# Altium PCB PCB_MDL_SEC_BAR.PcbDoc
Units mm, origin at the board's own origin, x right, y up, seen from the top; angles counter-clockwise.
Board outline 195.18 x 55.4 mm, 2 copper layers (Top Layer, Bottom Layer); 10 components, 15 nets, 56 pads, 4 vias.
Unrouted connection lines stored in the file: 2.
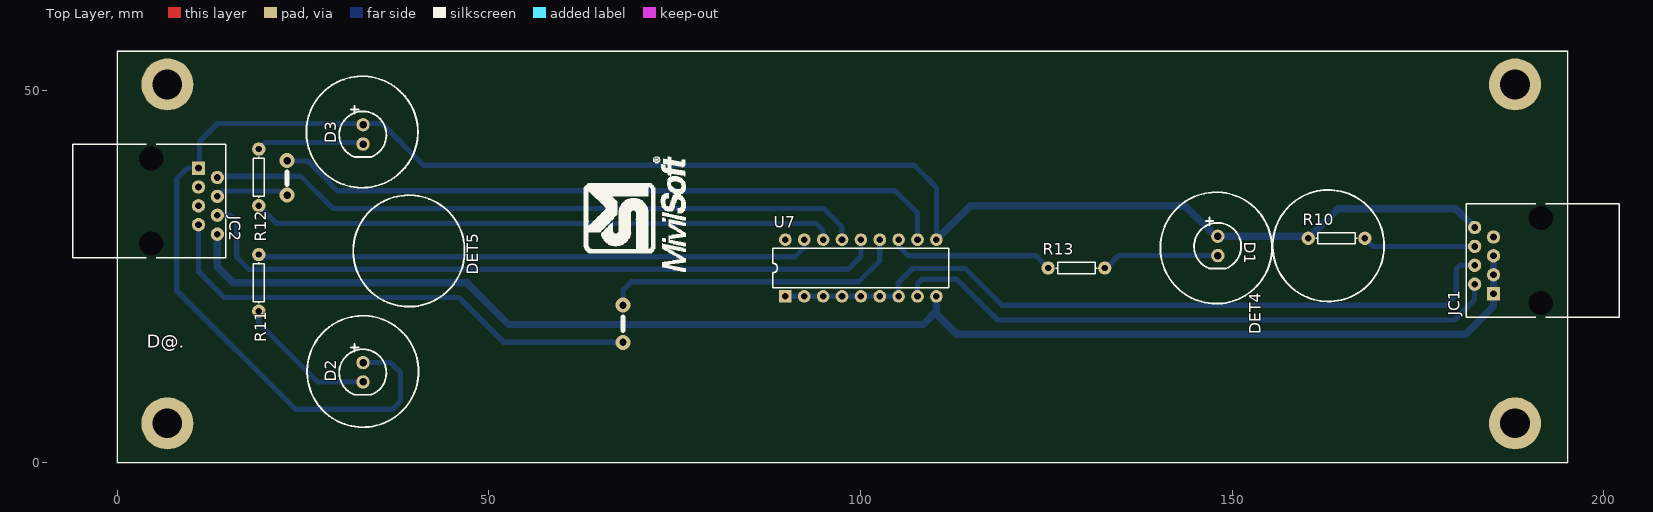
[diagram p0: Top Layer view]
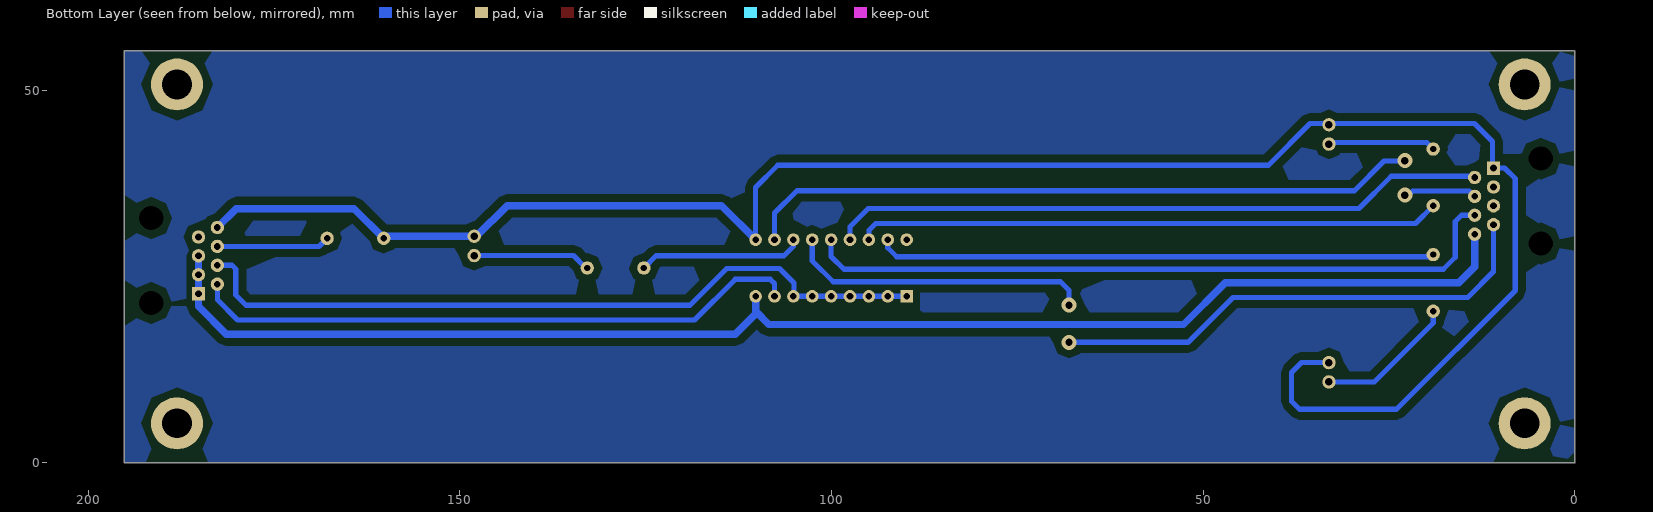
[diagram p1: Bottom Layer view, seen from below]

## Layer stack, top to bottom
Top Solder: solder mask 0.0102, Solder Resist, Dk 3.5
Top Layer: signal copper 0.0356
Dielectric 1: dielectric 0.32, FR-4, Dk 4.8
Bottom Layer: signal copper 0.0356
Bottom Solder: solder mask 0.0102, Solder Resist, Dk 3.5

## Board outline
0,0 0,55.28 cw(c0.05,55.28) 0.033,55.327 cw(c0.075,55.3) 0.075,55.35 195.099,55.35 cw(c195.099,55.3) 195.143,55.324 cw(c195.125,55.277) 195.176,55.277 195.176,0.051 cw(c195.125,0.051) 195.125,0.001 cw(c195.074,0) 195.125,0 cw(c195.074,0) 195.074,-0.05 0.05,-0.05 cw(c0.05,0)

## Design rules (kind name [scope] priority, off if disabled: settings)
Clearance "Poligono GND TOP" [(InNamedPolygon('GND BOTTON'))] p1: gap=1
Clearance [All] p2: gap=0.3
PolygonConnect [All] p1: connectstyle=Relief reliefconductorwidth=0.254 reliefentries=4 polygonreliefangle="90 Angle" airgapwidth=0.254
RoomDefinition barra_sec_principal [InComponentClass('barra_sec_principal')] p1: confinementstyle=ConfineIn formatcopy=TRUE lockcomponents=FALSE outline -0.002,0.025 195.178,0.025 195.178,55.352 -0.002,55.352
RoutingVias [All] p1: holewidth=0.711 width=1.27 viastyle="Through Hole" minholewidth=0.711 minwidth=1.27 maxholewidth=0.711 maxwidth=1.27
SolderMaskExpansion [All] p1: expansion=0.102
Width [All] p1: maxlimit=1 minlimit=0.7 preferedwidth=0.8
30 further rules are at their usual default settings.

## Components (designator, comment, footprint, x,y, rotation, side; value= is the part's Value field where it differs from the comment)
D1 "LED1" "LED5MM RED" 148.05,29.15 r270 top
D2 "LED1" "LED5MM RED" 33.05,12.15 r270 top
D3 "LED1" "LED5MM RED" 33.05,44.15 r270 top
JC1 "RJ45" 15-43-6233 202.05,27.15 r90 top
JC2 "RJ45" 15-43-6233 -5.95,35.15 r270 top
R10 "Res" AXIAL-0.3 164.05,30.15 r0 top
R11 "Res" AXIAL-0.3 19.05,24.15 r90 top
R12 "Res" AXIAL-0.3 19.05,38.345 r270 top
R13 "Res" AXIAL-0.3 129.05,26.15 r180 top
U7 "ULN2803A" A18 100.05,26.15 r0 top

## Footprints (in the part's own frame and the unit in brackets; to place one, negate y for a bottom-side part, rotate by r counter-clockwise, add the part's x,y. Pads: shape width x height; smd on the part's side, far side on the other; paste and mask are expansions set on the pad)
15-43-6233 [mm] "Connector; PCB Jack, Thru-Hole; 1-Port; Unshielded without Lightpipes; Right Angle"
  rect 1.8x1.8 hole 0.9: 1(-4.445,16.89)
  round 1.8 hole 0.9: 2(-3.175,19.43) 3(-1.905,16.89) 4(-0.635,19.43) 5(0.635,16.89) 6(1.905,19.43) 7(3.175,16.89) 8(4.445,19.43)
  round 2.95 hole 3.25 unplated: MH1(-5.715,10.54) MH2(5.715,10.54)
  silkscreen extent -7.62,0 7.62,20.58
A18 [mm] "DIP; 18 Leads; Row Spacing 7.62 mm; Pitch 2.54 mm"
  rect 1.7x1.7 hole 0.9 paste+0: 1(-10.16,-3.81)
  round 1.7 hole 0.9 paste+0: 2(-7.62,-3.81) 3(-5.08,-3.81) 4(-2.54,-3.81) 5(0,-3.81) 6(2.54,-3.81) 7(5.08,-3.81) 8(7.62,-3.81) 9(10.16,-3.81) 10(10.16,3.81) 11(7.62,3.81) 12(5.08,3.81) 13(2.54,3.81) 14(0,3.81) 15(-2.54,3.81) 16(-5.08,3.81) 17(-7.62,3.81) 18(-10.16,3.81)
  silkscreen extent -11.85,-2.65 11.85,2.65
AXIAL-0.3 [mm] "Axial Device, Thru-Hole; 2 Leads; 0.3 in Pin Spacing"
  round 1.8 hole 0.85: 1(-3.81,0) 2(3.81,0)
  silkscreen extent -2.77,-0.76 2.77,0.76
"LED5MM RED" [mm] "Led de 5mm rojo"
  round 1.8 hole 1.016: 1(-1.275,0.025) 2(1.325,0.025)
  silkscreen extent -3.81,-3.18 3.05,3.16, body extent -2.89,-2.88 2.54,3.14, height 12.31

## Part data
D1 D2 D3: "Typical RED GaAs LED"
JC1 JC2: library part 15-43-6233, "Right Angle, Standard Profile, RJ45-Keyed, Flange Mount PCB Jack"
R10 R11 R12 R13: library part Res1, "Resistor"
U7: "High-Voltage, High-Current Darlington Array"

## Free pads (board coordinates)
  round 7 hole 4: 0(6.75,5.25) 0(6.75,50.85) 0(188.05,5.25) 0(188.05,50.85)

## Via types
v1: diameter 2, hole 1, Top Layer to Bottom Layer, 4 vias

## Nets (pads, with @x,y where several pads share a name; then routed paths per layer and width w, separated by ;. In a path a pad name is that pad's centre, name@x,y a point inside that pad or via, vN(x,y) a via of type N, cw(c..) or ccw(c..) an arc to the next point about the centre after c; other vN are vias at no path point)
5VCC: D1.1 D2.1 D3.1 JC1.8 JC2.1 R10.1 U7.10 | length 258.1
  Bottom Layer w0.7: JC2.1 9.445,39.595 8,38.15 8,23.125 23.975,7.15 37.05,7.15 38.125,8.225 38.125,12.075 36.775,13.425 D2.1 ; JC2.1@11.075,39.925 11.075,43.175 13.475,45.575 32.925,45.575 D3.1 33.225,45.575 35.625,45.575 41.225,39.975 107.225,39.975 110.21,36.99 U7.10 ; D1.1@147.775,30.425 D1.1 ; R10.1@159.965,30.425 R10.1
  Bottom Layer w1: U7.10 114.8,34.55 143.65,34.55 D1.1@147.775,30.425 ; D1.1 R10.1@159.965,30.425 ; R10.1 164.24,34.15 180.065,34.15 JC1.8
BUZZER: JC1.2 U7.8 | length 82.4
  Bottom Layer w0.7: U7.8 107.67,24.045 108.25,24.625 112.95,24.625 118.425,19.15 179.9,19.15 182.62,21.87 JC1.2
BUZZER_OUT: JC2.4 U7.11 | length 101
  Bottom Layer w0.7: JC2.4 14.195,36.5 21.8,36.5 22.35,35.95 v1@22.7,35.95 ; v1@22.85,40.55 25.65,40.55 29.65,36.55 104.65,36.55 107.67,33.53 U7.11
  other v1: 22.85,35.95 22.85,40.6
D1: R13.2 U7.12 | length 22.2
  Bottom Layer w0.7: U7.12 105.13,29.07 106.4,27.8 123.59,27.8 R13.2
D2: R11.2 U7.17 | length 75.1
  Bottom Layer w0.7: R11.2@19.05,27.956 19.331,27.675 91.225,27.675 92.43,28.88 U7.17
D3: R12.2 U7.16 | length 78.6
  Bottom Layer w0.7: R12.2 21.435,32.15 94.05,32.15 94.97,31.23 U7.16
D4: JC2.2 U7.15 | length 88.7
  Bottom Layer w0.7: JC2.2 13.655,38.5 24.7,38.5 29.05,34.15 95.05,34.15 97.51,31.69 U7.15
D5: JC2.6 U7.14 | length 95.4
  Bottom Layer w0.7: JC2.6 15.255,33.245 16.075,32.425 16.075,27.6 17.7,25.975 98.325,25.975 100.05,27.7 U7.14
D6: JC2.7 U7.13 | length 108.4
  Bottom Layer w0.7: JC2.7 10.94,25.66 14.4,22.2 46,22.2 52.05,16.15 v1(68.05,16.15) ; v1(68.05,21.15) 68.05,23.15 69.2,24.3 99.775,24.3 102.59,27.115 U7.13
GND: JC1.1 JC1.3 JC1.5 JC2.8 U7.9 | length 193.9
  Bottom Layer w0.7: 110.21,20.31 U7.9
  Bottom Layer w1: JC2.8 13.48,26.32 15.625,24.175 47.025,24.175 52.65,18.55 108.45,18.55 110.21,20.31 ; U7.9 110.21,19.99 112.95,17.25 181.425,17.25 185.16,20.985 JC1.1 JC1.3 JC1.5
NetD1_2: D1.2 R13.1 | length 15.6
  Bottom Layer w0.7: R13.1@133.145,26.245 134.725,27.825 D1.2
NetD2_2: D2.2 R11.1 | length 18.9
  Bottom Layer w0.7: R11.1 19.05,18.75 26.975,10.825 D2.2
NetD3_2: D3.2 R12.1 | length 14.5
  Bottom Layer w0.7: R12.1 19.921,43.025 32.875,43.025 D3.2
P_RJ45: JC1.6 R10.2 | length 15.2
  Bottom Layer w0.7: R10.2 168.955,29.055 JC1.6
PWM: JC1.4 U7.1 U7.2 U7.3 U7.4 U7.5 U7.6 U7.7 | length 100.9
  Bottom Layer w0.7: U7.1 U7.2 U7.3 U7.4 U7.5 U7.6 U7.7 ; U7.7@105.05,23.15 105.05,24.15 107,26.1 114.1,26.1 119.05,21.15 178.775,21.15 180.15,22.525 180.15,26 180.665,26.515 JC1.4
pads on no net: JC1.7 JC1.MH1 JC1.MH2 JC2.3 JC2.5 JC2.MH1 JC2.MH2 U7.18

## Polygon pours and split planes (outlines as drawn)
GND on Bottom Layer "GND BOTTON" (solid, pour order 4): 0.075,55.35 0.079,55.347 195.119,55.347 195.119,0.003 195.125,-0.003 195.121,0 0,0

## Silkscreen, mask and mechanical layers (free items; w line width, h text height)
Top Overlay:
  drawing of 870 lines, arcs and shapes, not listed
  text "DET5" at 48.55,25.25 h1.52 r90
  text "DET4" at 153.85,17.25 h1.52 r90
  text "D@." at 4,14.85 h3
Mechanical 1:
  lines w0.254: 196.542,1.674 197.05,0.15 ; 196.542,53.626 197.05,55.15 ; 196.796,0.15 197.304,0.15 ; 196.796,55.15 197.304,55.15 ; 197.05,22.546 197.05,0.15 ; 197.05,32.754 197.05,55.15 ; 197.558,1.674 197.05,0.15 ; 197.558,53.626 197.05,55.15
  text "55 (mm)" at 197.965,22.8 h1.52 r90